# Altium PCB VFD.PcbDoc
Units mil, origin at the board's own origin, x right, y up, seen from the top; angles counter-clockwise.
Board outline 5409.55 x 5005.1 mil, 2 copper layers (Top Layer, Bottom Layer), stack 61.855 mil thick; 92 components, 43 nets, 272 pads, 80 vias.
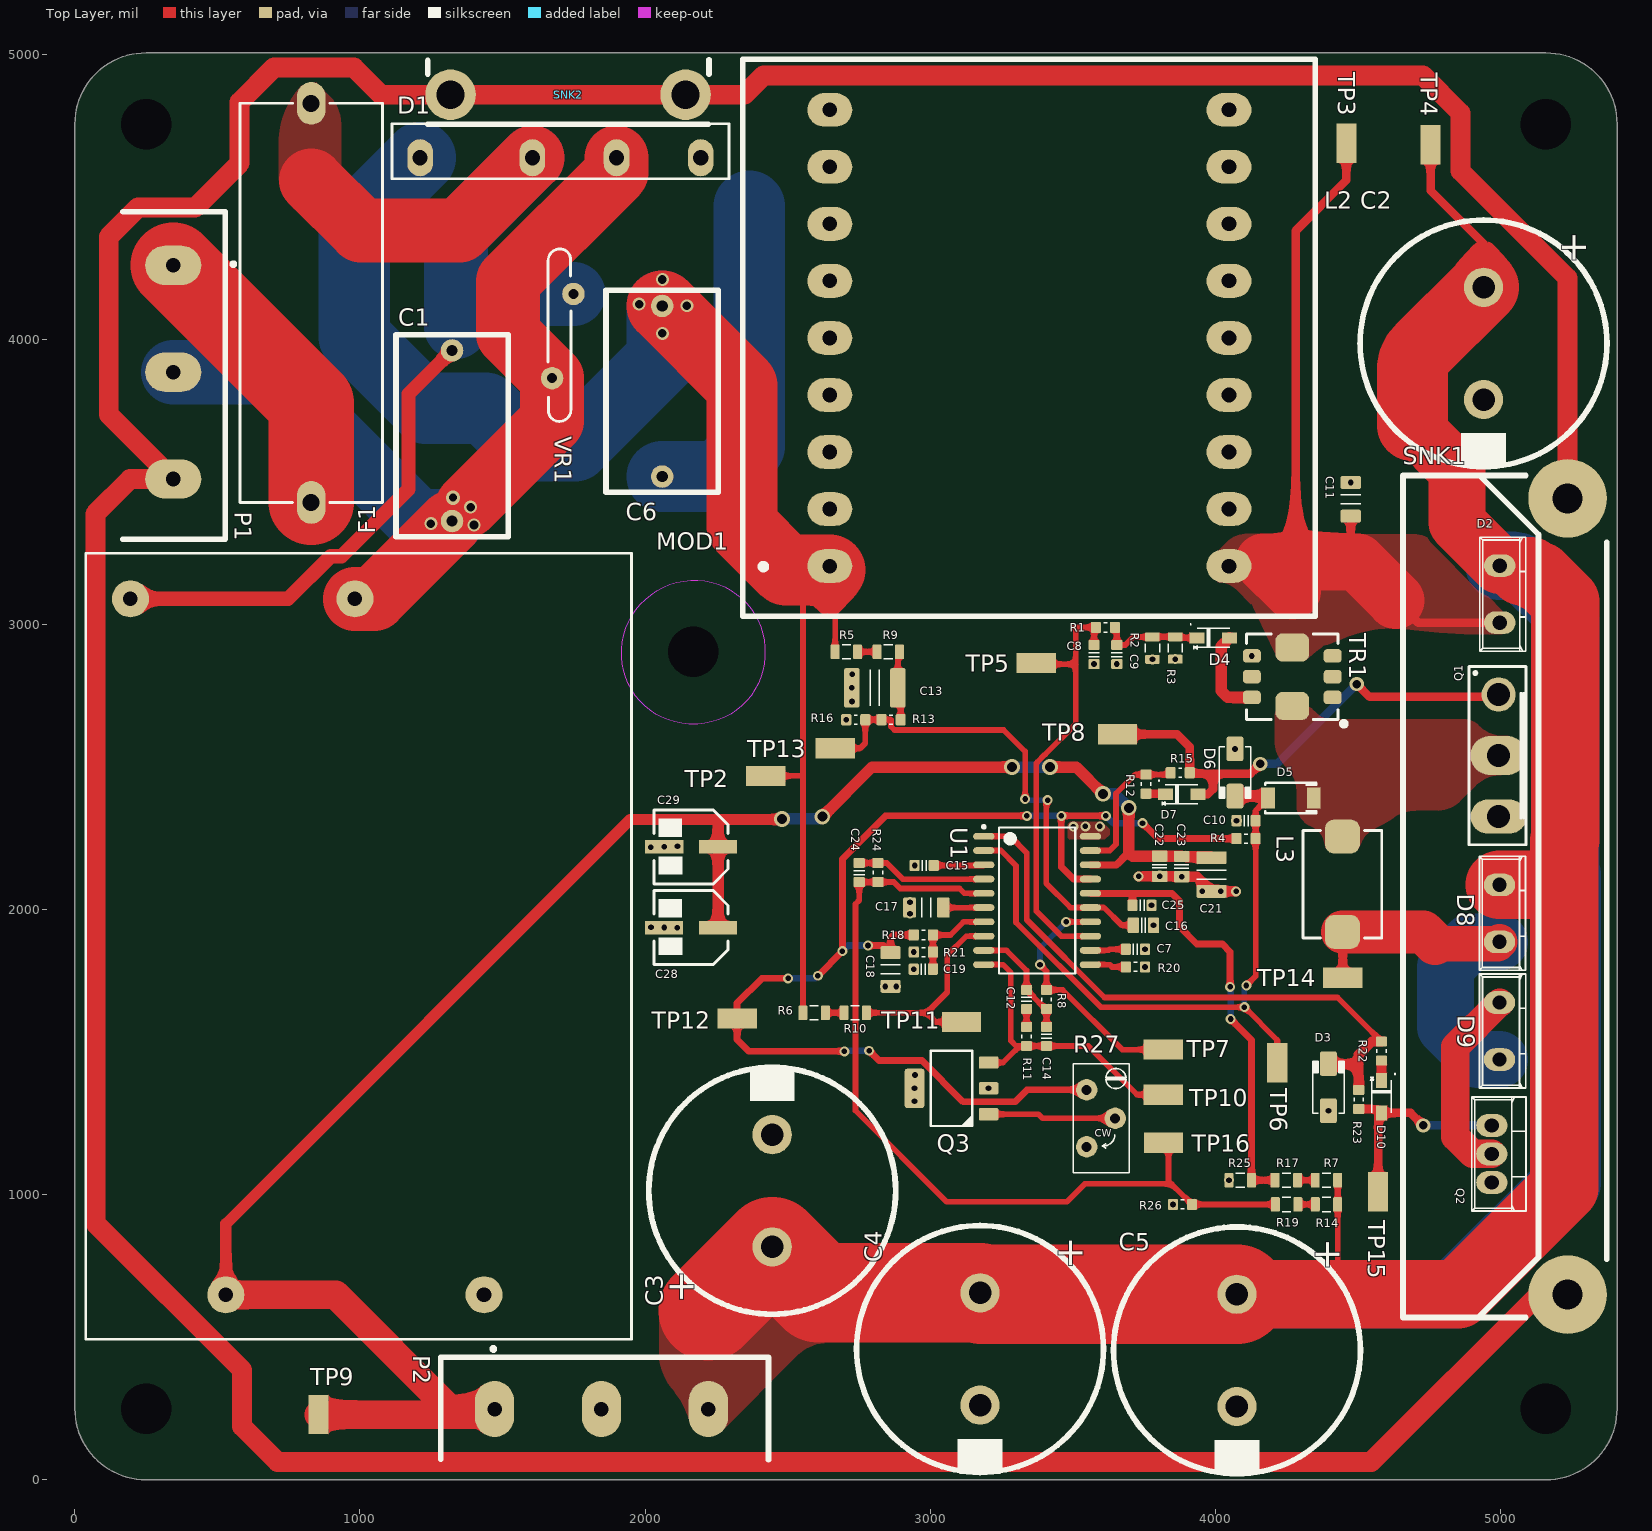
[diagram p0: Top Layer view]
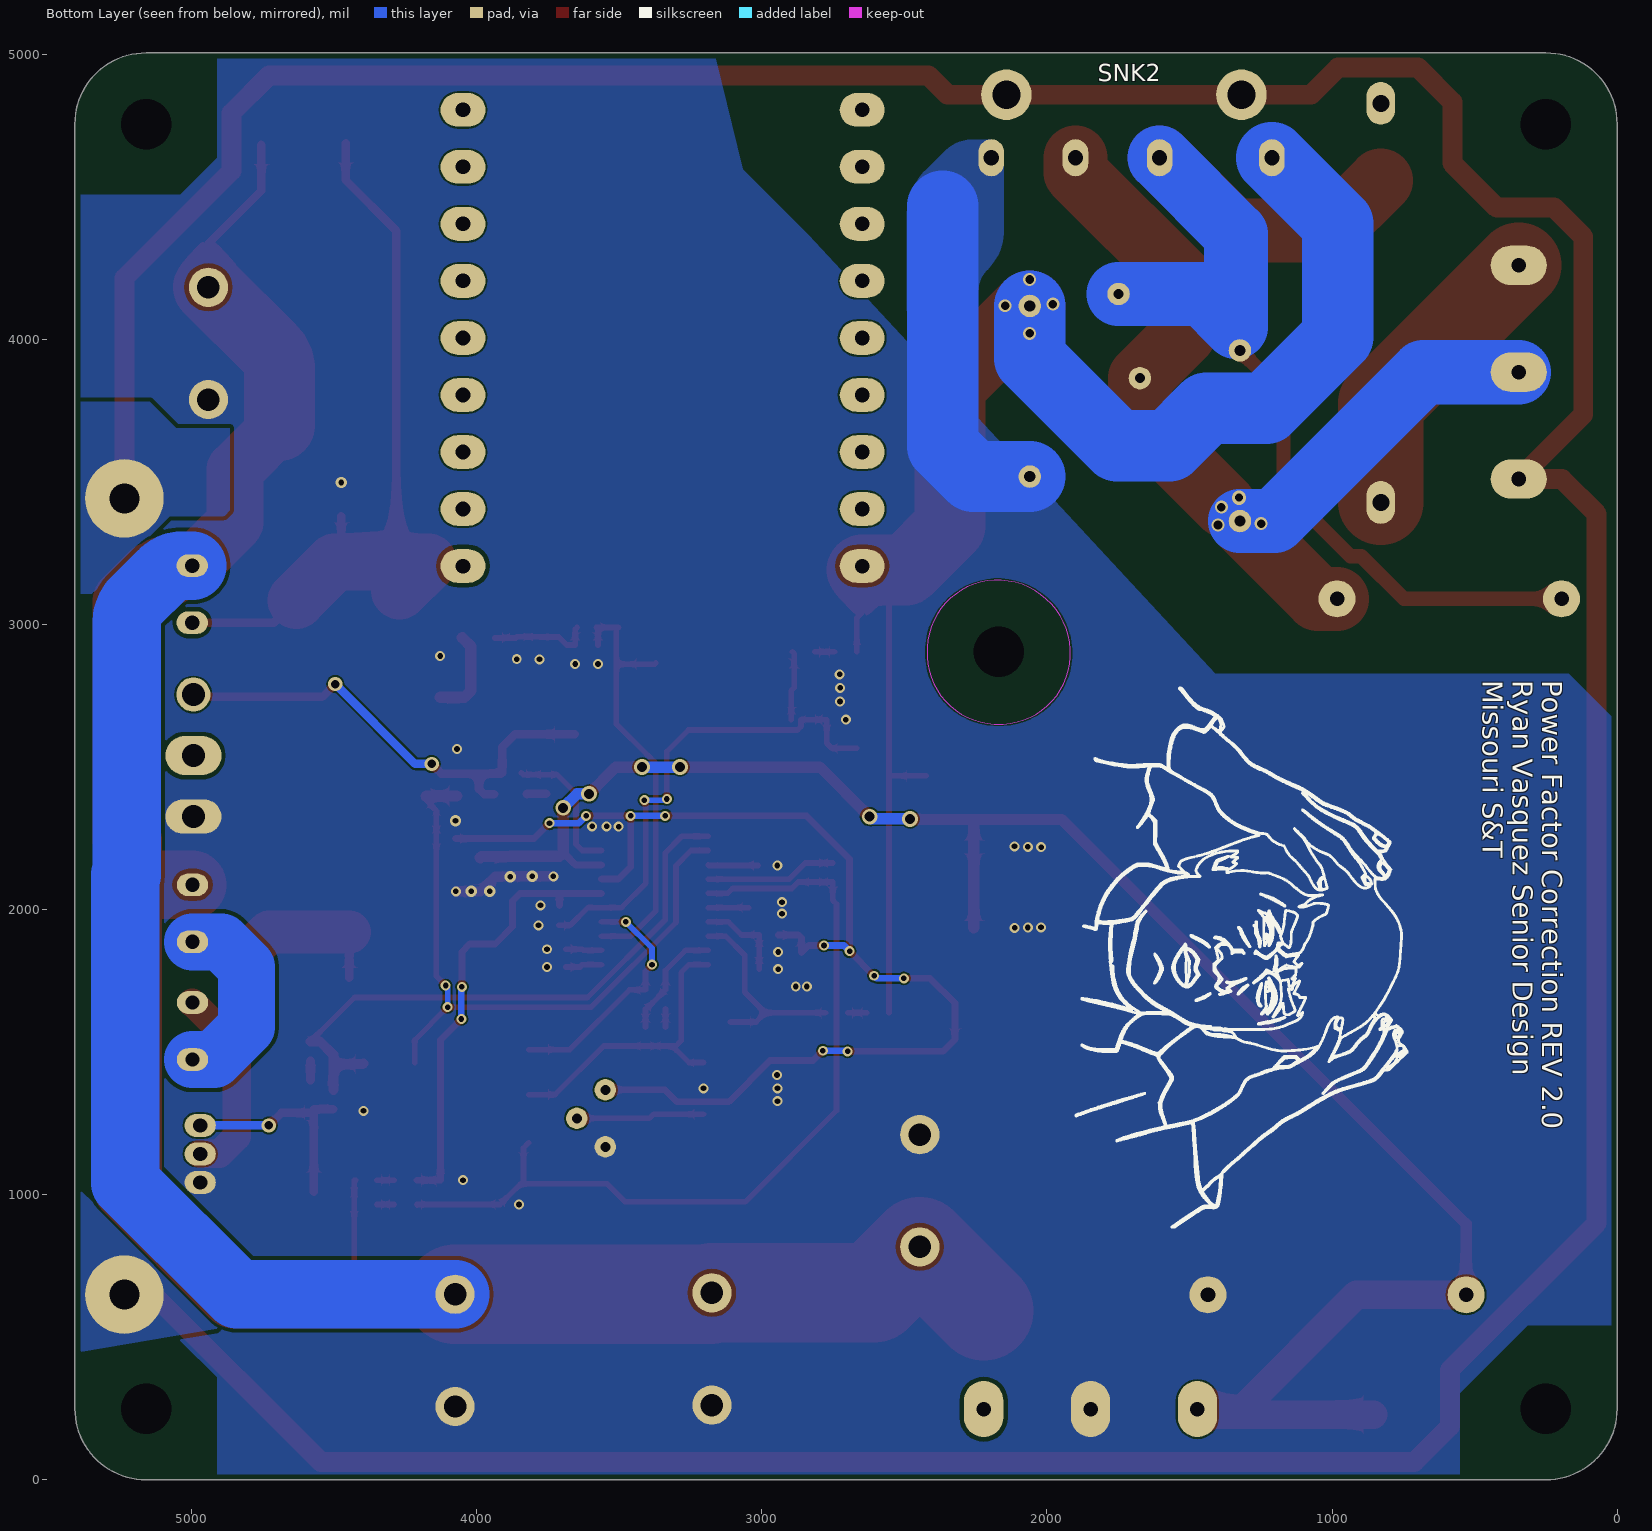
[diagram p1: Bottom Layer view, seen from below]

## Layer stack, top to bottom
Top Solder: solder mask 0.3937, Solder Resist, Dk 3.5
Top Layer: signal copper 1.4
Dielectric 1: dielectric 59.0551, FR-4, Dk 4.8
Bottom Layer: signal copper 1.4
Bottom Solder: solder mask 0.4, Solder Resist, Dk 3.5

## Board outline
0,250.05 0,4755 cw(c250.05,4755) 250.05,5005.05 5159.5,5005.05 5159.5,5005 cw(c5159.5,4754.95) 5409.55,4754.95 5409.5,4754.95 5409.5,250 cw(c5159.45,250) 5159.45,-0.05 5159.45,0 250.05,0 cw(c250.05,250.05)

## Design rules (kind name [scope] priority, off if disabled: settings)
BoardOutlineClearance [All] p1: gap=20
Clearance "HV Clearance" [InNetClass('HV')] p1: gap=15
Clearance [All] p2: gap=6
ComponentClearance [All] p1 off: gap=10 collisioncheckmode=3 verticalgap=10 showdistances=FALSE
Height [All] p1 off: minheight=0 maxheight=1000 prefheight=500
HoleSize [All] p1: absolutevalues=TRUE maxlimit=1000 minlimit=8 maxpercent=80.000 minpercent=20.000
MinimumAnnularRing [All] p1: minimumring=5
MinimumSolderMaskSliver [All] p1: minsoldermaskwidth=4
PolygonConnect [All] p1: connectstyle=Direct reliefconductorwidth=10 reliefentries=4 polygonreliefangle="90 Angle" airgapwidth=10
RoutingVias [All] p1: holewidth=10 width=20 viastyle="Through Hole" minholewidth=8 minwidth=18 maxholewidth=1000 maxwidth=1000
SilkToSilkClearance [All] p1 off: silktosilkclearance=0
SilkToSolderMaskClearance [IsPad] p1 off: minsilkscreentomaskgap=4 clearancetoexposedcopper=TRUE
SolderMaskExpansion [All] p1: expansion=4
Width [All] p1: maxlimit=1000 minlimit=4 preferedwidth=10
24 further rules are at their usual default settings.

## Classes and differential pairs
net class HV: 170V 350V AC_IN NetC11_1 NetD5_K NetD8_2 NetF1_1 NetP1_3

## Components (designator, comment, footprint, x,y, rotation, side; value= is the part's Value field where it differs from the comment)
C1 "R71MI4100AA30K" R71MI4100AA30K 1323,3662 r270 top
C2 "120u" "Capacitor 22mmx25mm" 4941,3985.85 r270 top
C3 "120u" "Capacitor 22mmx25mm" 2446,1013.85 r90 top
C4 "120u" "Capacitor 22mmx25mm" 3175,459 r270 top
C5 "120u" "Capacitor 22mmx25mm" 4076,454 r270 top
C6 "R71MI4100AA30K" R71MI4100AA30K 2060,3818 r270 top
C7 "33p" CAPC1608X90N 3720,1861 r180 top
C8 "approved sub OK" CAPC1608X90N 3574.62,2894.69 r270 top
C9 "approved sub OK" CAPC1608X90N 3654.62,2894.69 r270 top
C10 "220p" CAPC1608X90N 4108,2312 r180 top
C11 "120p" CAPC3216X180N 4475,3439 r90 top
C12 "6.2n" CAPC1608X90N 3338,1685.05 r90 top
C13 "GRM43DR72J104KW01L" CAPC4532X280N 2806.05,2778 r180 top
C14 "220p" CAPC1608X90N 3408,1555.05 r90 top
C15 "180p" CAPC1608X90N 2979,2155 r0 top
C16 "approved sub OK" CAPC2012X135N 3748,1945 r0 top
C17 "approved sub OK" CAPC3216X180N 2986.94,2007 r180 top
C18 "approved sub OK" CAPC3216X180N 2861,1790 r270 top
C19 "approved sub OK" CAPC1608X90N 2976,1791.05 r180 top
C21 "10µ" CAPC3225X220N 3987,2123 r270 top
C22 "approved sub OK" CAPC2012X135N 3805,2152 r270 top
C23 "approved sub OK" CAPC2012X135N 3882,2151 r270 top
C24 "approved sub OK" CAPC1608X90N 2751,2130 r270 top
C25 "approved sub OK" CAPC1608X90N 3743,2015 r0 top
C28 "HHXB350ARA680MF80G" CAP_POLY_HXB_F80 2161.49,1937 r270 top
C29 "HHXB350ARA680MF80G" CAP_POLY_HXB_F80 2161.51,2220 r270 top
D1 "GBJ2506-F" "4-SIP, GBJ" 1211.02,4637 r0 top
D2 "C3D06065I" TO220-2 4997.74,3206.26 r270 top
D3 "B320A-13-F" DO-214AC 4397,1377 r90 top
D4 "B320A-13-F" SOD123F 3992.96,2953 r0 top
D5 "ES1JAF" "DO-214AD  SMAF" 4265,2391 r0 top
D6 "B320A-13-F" DO-214AC 4069,2481 r270 top
D7 "B320A-13-F" SOD123F 3882.05,2405 r0 top
D8 "C3D06065I" TO220-2 4996.74,2087 r270 top
D9 "C3D06065I" TO220-2 4997,1674 r270 top
D10 "B320A-13-F" SOD123F 4583.05,1344 r270 top
F1 "Slow-blow" "3AB 3AG fuseholder" 829,4128 r90 top
L2 "120µH" "ETD 44 Horizontal" 3348,4005 r90 top
L3 "SLR1050B-121KE_" SLR1050 4446,2089 r180 top
MOD1 "VOF-15-15" "VOF-15-15 4 DIP" 1435.21,649.06 r90 top
P1 "*" "TE 796739-3 3 Screw Terminal" 345.05,3885 r270 top
P2 "*" "TE 796739-3 3 Screw Terminal" 1847,248 r0 top
Q1 "C3M0065090D" TO-247-3 4993.74,2540.26 r0 top
Q2 "IPP50R380CE" TO220V-GDS 4970,1243 r270 top
Q3 "PNP" SOT223 3075,1373 r180 top
R1 "Thick Film" RESC1608X55N 3614.62,2989.69 r0 top
R2 "Thick Film" RESC2012X70N 3779.58,2916.98 r270 top
R3 "Thick Film" RESC2012X70N 3859.58,2917.61 r270 top
R4 "Thick Film" RESC1608X55N 4108,2249 r0 top
R5 "Thick Film" RESC2012X70N 2706,2904 r0 top
R6 "Thick Film" RESC2012X70N 2593,1638 r0 top
R7 "Thick Film" RESC2012X70N 4390,1051 r180 top
R8 "Thick Film" RESC1608X55N 3408,1685.05 r270 top
R9 "Thick Film" RESC2012X70N 2853,2904 r0 top
R10 "Thick Film" RESC2012X70N 2737,1638 r0 top
R11 "Thick Film" RESC1608X55N 3338,1555.05 r90 top
R12 "Thick Film" RESC1608X55N 3757.05,2440 r270 top
R13 "Thick Film" RESC1608X55N 2863,2666 r180 top
R14 "Thick Film" RESC2012X70N 4390.05,966 r180 top
R15 "Thick Film" RESC1608X55N 3877.05,2480 r0 top
R16 "Thick Film" RESC1608X55N 2739,2666 r180 top
R17 "Thick Film" RESC2012X70N 4249.42,1051 r180 top
R18 "Thick Film" RESC1608X55N 2976,1911.05 r0 top
R19 "Thick Film" RESC2012X70N 4250.05,966 r180 top
R20 "Thin Film" RESC1608X55N 3720,1799 r0 top
R21 "Thick Film" RESC1608X55N 2976,1851.05 r180 top
R22 "Thick Film" RESC1608X55N 4583.05,1504 r270 top
R23 "Thick Film" RESC1608X55N 4503.05,1334 r270 top
R24 "Thick Film" RESC1608X55N 2817,2130 r270 top
R25 "Thick Film" RESC2012X70N 4087.63,1051 r180 top
R26 "Thick Film" RESC1608X55N 3885,966 r180 top
R27 "25 Turn" "TrimPot_THT_2.54mm pitch" 3549,1368 r0 top
SNK1 "OMNI-UNI-41-75" OMNI-UNI-41-75 5235.74,2046 r270 top
SNK2 "C247-025-1AE" "TO-247-2 With HeatSink 25mm" 1730,4677 r0 top
TP2 "*" "1206 Test Point" 2423,2469 r180 top
TP3 "*" "1206 Test Point" 4460,4688 r270 top
TP4 "*" "1206 Test Point" 4755,4683 r90 top
TP5 "*" "1206 Test Point" 3372,2865 r180 top
TP6 "*" "1206 Test Point" 4217,1463 r90 top
TP7 "*" "1206 Test Point" 3817,1509 r180 top
TP8 "*" "1206 Test Point" 3657,2615 r0 top
TP9 "*" "1206 Test Point" 855,229 r270 top
TP10 "*" "1206 Test Point" 3817,1351 r180 top
TP11 "*" "1206 Test Point" 3110,1606 r180 top
TP12 "*" "1206 Test Point" 2323,1618 r180 top
TP13 "*" "1206 Test Point" 2667,2566 r0 top
TP14 "*" "1206 Test Point" 4447,1761 r180 top
TP15 "*" "1206 Test Point" 4571,1010 r90 top
TP16 "*" "1206 Test Point" 3818,1182 r180 top
TR1 "CST1-100LB" CST1 4270,2817 r180 top
U1 "UC2855ADW" SOIC127P1030X265-20N 3375,2032 r0 top
VR1 "Varistor" "B722 14MM MOV" 1674,4159.28 r270 top

## Footprints (in the part's own frame and the unit in brackets; to place one, negate y for a bottom-side part, rotate by r counter-clockwise, add the part's x,y. Pads: shape width x height; smd on the part's side, far side on the other; paste and mask are expansions set on the pad)
"3AB 3AG fuseholder" [mil]
  oval 150x100 hole 60: 1(-700,0) 2(700,0)
  silkscreen extent -700,-250 700,250
"4-SIP, GBJ" [mil] "Bridge Rectifier Single Phase 600V 25A Through Hole GBJ"
  oval 90x130 hole 53.15: 1(0,0) 2(393.7,0) 3(688.98,0) 4(984.25,0)
  silkscreen extent -98,-74 1084,119, body extent -97,-74 1084,119, height 984
"1206 Test Point" [mm]
  rect 3.5x1.8 smd: 1(0,0)
  body extent -1.6,-0.8 1.6,0.8, height 1.26
"B722 14MM MOV" [mm] "MOV"
  round 2 hole 0.9: 1(0,1.9) 2(7.5,0)
  silkscreen extent -4.01,-0.36 11.35,1.68, body extent -4.07,-1.24 11.43,2.96, height 19
CAP_POLY_HXB_F80 [mm]
  rect 1.2x3.4 smd: 1(0,2.4) 2(0,-2.4)
  silkscreen extent -3.3,-3.3 3.3,3.3, body extent -3.3,-3.49 3.3,3.51, height 7.01
"Capacitor 22mmx25mm" [mm]
  round 3.5 hole 2: 1(-5,0) 2(5,0)
  silkscreen extent -11,-11 11,11, body extent -11,-11 11,11, height 25
CAPC1608X90N [mm] "Chip Capacitor, Body 1.6x0.8mm, EIA 0603, IPC Medium Density"
  round 0.254 on Mech15: 0(0,0)
  rrect25% 0.9x1 smd: 1(-0.85,0) 2(0.85,0)
  Top Layer pour cut-out: -0.6,0.5 -0.4,0.7 0.4,0.7 0.6,0.5 0.6,-0.5 0.4,-0.7 -0.4,-0.7 -0.6,-0.5
  silkscreen extent -0.18,-0.48 0.18,0.48, body extent -0.85,-0.45 0.85,0.45, height 0.89
CAPC2012X135N [mm] "Chip Capacitor, Body 2.0x1.2mm, EIA 0805, IPC Medium Density"
  round 0.254 on Mech15: 0(0,0)
  rrect25% 1x1.4 smd: 1(-0.9,0) 2(0.9,0)
  silkscreen extent -0.15,-0.65 0.15,0.65, body extent -1.1,-0.72 1.1,0.73, height 1.34
CAPC3216X180N [mm] "Chip Capacitor, Body 3.2x1.6mm, 1.8mm H, EIA 1206, IPC Medium Density"
  round 0.508 on Mech15: 0(0,0)
  rrect25% 1.15x1.8 smd: 1(-1.5,0) 2(1.5,0)
  silkscreen extent -0.4,-0.88 0.4,0.88, body extent -1.7,-0.9 1.7,0.9, height 1.8
CAPC3225X220N [mm] "Chip Capacitor, Body 3.2x2.5mm, EIA 1210, IPC Medium Density"
  round 0.508 on Mech15: 0(0,0)
  rrect25% 1.15x2.7 smd: 1(-1.5,0) 2(1.5,0)
  silkscreen extent -0.4,-1.3 0.4,1.3, body extent -1.8,-1.4 1.8,1.4, height 2.19
CAPC4532X280N [mm] "Chip Capacitor, Body 4.5x3.2mm, 1812, IPC Medium Density"
  round 0.508 on Mech15: 0(0,0)
  rrect25% 1.4x3.5 smd: 1(-2.05,0) 2(2.05,0)
  silkscreen extent -0.4,-1.6 0.4,1.6, body extent -2.45,-1.8 2.45,1.8, height 2.79
CST1 [mm] "Current Transformer"
  rrect50% 1.6x1.2 smd: 1(-3.6,0) 1(-3.6,1.85) 1(3.6,0) 3(-3.6,-1.85) 4(3.6,-1.85) 6(3.6,1.85)
  rrect50% 3x2.5 smd: 7(0,2.6) 8(0,-2.6)
  silkscreen extent -4.65,-3.8 4.08,4.25, body extent -4.06,-3.8 4.07,3.8, height 5.3
DO-214AC [mm] "JEDEC DO214 variation AC. SMA"
  round 0.508 on Mech15: 0(0,0)
  rrect25% 2.2x1.5 smd: A(-2.1,0) K(2.1,0)
  silkscreen extent -2.3,-1.4 2.3,1.4, body extent -2.6,-1.3 2.6,1.3, height 2.42
"DO-214AD  SMAF" [mm]
  rect 1.24x1.89 smd: A(-2.04,0) K(2.04,0)
  silkscreen extent -2.3,-1.4 2.3,1.4, body extent -2.35,-1.35 2.35,1.35, height 1.1
"ETD 44 Horizontal" [mm]
  oval 3x4 hole 1.3: 1(-20.32,17.78) 2(-20.32,-17.78) 3(-15.24,17.78) 4(-15.24,-17.78) 5(-10.16,17.78) 6(-10.16,-17.78) 7(-5.08,17.78) 8(-5.08,-17.78) 9(0,17.78) 10(0,-17.78) 11(5.08,17.78) 12(5.08,-17.78) 13(10.16,17.78) 14(10.16,-17.78) 15(15.24,17.78) 16(15.24,-17.78) 17(20.32,17.78) 18(20.32,-17.78)
  silkscreen extent -24.79,-25.48 24.82,25.53, body extent -24.79,-25.47 24.81,25.53, height 38.1
OMNI-UNI-41-75 [mm]
  round 7 hole 2.67: 0(-35.47,0) 0(35.47,0)
  silkscreen extent -37.5,-14.67 37.5,3.48, body extent -37.5,-14.67 37.5,26.33, height 63
R71MI4100AA30K [mm] "1µF Film Capacitor 220V 420V Polypropylene (PP), Metallized Radial"
  round 2 hole 1: 1(-7.6,0) 2(7.6,0)
  silkscreen extent -9,-5 9,5, body extent -9.25,-5.08 9.25,5.13, height 16.1
RESC1608X55N [mm] "Chip Resistor, Body 1.6x0.8mm, EIA 0603, IPC Medium Density"
  round 0.254 on Mech15: 0(0,0)
  rrect25% 0.9x1 smd: 1(-0.85,0) 2(0.85,0)
  Top Layer pour cut-out: -0.6,0.5 -0.4,0.7 0.4,0.7 0.6,0.5 0.6,-0.5 0.4,-0.7 -0.4,-0.7 -0.6,-0.5
  silkscreen extent -0.15,-0.41 0.15,0.41, body extent -0.87,-0.47 0.88,0.48, height 0.54
RESC2012X70N [mm] "Chip Resistor, Body 2.0x1.2mm, EIA 0805, IPC Medium Density"
  round 0.254 on Mech15: 0(0,0)
  rrect25% 0.8x1.3 smd: 1(-1,0) 2(1,0)
  Top Layer pour cut-out: -0.725,0.65 -0.525,0.85 0.525,0.85 0.725,0.65 0.725,-0.65 0.525,-0.85 -0.525,-0.85 -0.725,-0.65
  silkscreen extent -0.38,-0.64 0.38,0.64, body extent -1.1,-0.67 1.1,0.68, height 0.69
SLR1050 [mm] "SLR1050 Series High Current  Shielded Power Inductors"
  rrect50% 3.1x3 smd: 1(0,-4.25) 2(0,4.25)
  silkscreen extent -3.5,-4.8 3.5,4.8, body extent -3.5,-4.8 3.5,4.8, height 4.85
SOD123F [mm]
  rect 1.34x1 smd: A(1.45,0) K(-1.45,0)
  silkscreen extent -2.07,-1 1.45,1.25, body extent -1.8,-0.97 1.8,0.97, height 1.08
SOIC127P1030X265-20N [mm] "SOIC, 20-Leads, Body 12.80x7.50mm, Pitch 1.27mm, IPC Medium Density"
  oval 1.9x0.6 smd: 1(-4.75,5.715) 2(-4.75,4.445) 3(-4.75,3.175) 4(-4.75,1.905) 5(-4.75,0.635) 6(-4.75,-0.635) 7(-4.75,-1.905) 8(-4.75,-3.175) 9(-4.75,-4.445) 10(-4.75,-5.715) 11(4.75,-5.715) 12(4.75,-4.445) 13(4.75,-3.175) 14(4.75,-1.905) 15(4.75,-0.635) 16(4.75,0.635) 17(4.75,1.905) 18(4.75,3.175) 19(4.75,4.445) 20(4.75,5.715)
  silkscreen extent -4.87,-6.5 3.4,6.69, body extent -5.15,-6.5 5.15,6.5, height 2.65
SOT223 [mm] "SOT223 /SC-73"
  round 1 on Mech15: 0(0,0)
  rrect25% 1.75x1.1 smd: 1(-3.3,2.3) 2(-3.3,0) 3(-3.3,-2.3)
  rrect25% 1.75x3.5 smd: 4(3.3,0)
  silkscreen extent -1.85,-3.35 1.85,3.35, body extent -3.65,-3.35 3.65,3.35, height 1.8
"TE 796739-3 3 Screw Terminal" [mm]
  oval 3.5x5 hole 1.3: 1(-9.52,0) 2(0,0) 3(9.52,0)
  silkscreen extent -14.3,-4.5 14.88,5.45, body extent -14.28,-7.88 14.88,4.62, height 21.65
TO220-2 [mil]
  oval 80x110 hole 50: 1(0,0) 2(200,0)
  silkscreen extent -100,-70 300,92, body extent -95,-90 285,88, height 738
TO220V-GDS [mil]
  oval 80x110 hole 50: 1(0,0) 2(100,0) 3(200,0)
  silkscreen extent -100,-70 300,120, body extent -110,-71 310,120, height 940
"TO-247-2 With HeatSink 25mm" [mm]
  round 4.5 hole 2.5: 0(-10.47,4.6) 0(10.47,4.6)
  silkscreen extent -12.5,1.98 12.55,7.72, body extent -12.5,-5.85 12.5,12.15, height 38
TO-247-3 [mil]
  round 120 hole 80: 1(0,214)
  oval 196.85x137.8 hole 80: 2(0,0)
  oval 196.85x120 hole 80: 3(0,-214)
  silkscreen extent -104,-313 96,313, body extent -104,-313 96,313, height 998
"TrimPot_THT_2.54mm pitch" [mil] "TRIMMER, MURATA, PV36Y"
  round 75 hole 35: 1(0,0) 2(100,-100) 3(0,-200)
  silkscreen extent -47,-291 150,91, body extent -47,-287 150,91, height 445
"VOF-15-15 4 DIP" [mm] "Open Frame AC DC Converter 1 Output 15V 1A 85 ~ 264 VAC Input"
  round 3.302 hole 1.3: GND(0,0) L(62,31.5) N(62,11.5) Vo(0,23)
  silkscreen extent -3.96,-13.13 66.07,35.48, body extent -3.95,-13.12 66.05,35.48, height 22.95

## Part data
C1 C6: library part CAPMF_1u_420V_MK, "1µF Film Capacitor 220V 420V Polypropylene (PP), Metallized Radial"
C2 C3 C4 C5: library part CAPE_120u_450V_THD, "Aluminum Electrolytic Capacitors Radial, Can - Snap-In 2000 Hrs @ 85°C"
C7: library part CAPC_33p_0603_NP0_50V_5%, "Capacitor SMD Cer 33pF 5% 50V NP0 0603"
C8 C9 C19: library part CAPC_1n_0603_X7R_100V_10%, "Capacitor SMD Cer 1nF 10% 100V X7R 0603"
C10: library part CAPC_220p_0603_NP0_50V_5%, "Capacitor SMD Cer 220pF 5% 50V NP0 0603"
C11: library part CAPC_120p_1206_U2J_1KV_5%, "Capacitor SMD Cer 120pF 5% U2J 1KV 1206"
C12: library part CAPC_6.2nF_0603_NP0_50V, "Capacitor SMD Cer 8pF ±0.5pF 50V NP0 0603"
C13: library part CAPC_100n_1812_X7R_630V_10%, "0.1µF ±10% 630V Ceramic Capacitor X7R 1812 (4532 Metric)"
C14: library part CAPC_220p_0603_NP0_50V_1%, "Capacitor SMD Cer 220pF 1% 50V NP0 0603"
C15: library part CAPC_180p_0603_NP0_50V_1%, "Capacitor SMD Cer 180pF 1% 50V NP0 0603"
C16: library part CAPC_470n_0805_X7R_50V_10%, "0.47µF ±10% 50V Ceramic Capacitor X7R 0805 (2012 Metric)"
C17 C18: library part CAPC_1u_1206_X7R_35V_10%, "Capacitor SMD Cer 1uF 10% 35V X7R 1206"
C21: library part CAPC_10u_1210_50V, "Capacitor SMD Cer 10uF 20% 16V X5R 1210"
C22 C23: library part CAPC_100n_0805_X7R_50V_10%, "Capacitor SMD Cer 100nF 10% 50V X7R 0805"
C24: library part CAPC_82n_0603_X7R_50V_10%, "Capacitor SMD Cer 82nF 10% 50V X7R 0603"
C25: library part CAPC_100n_0603_X7R_50V_10%, "Capacitor SMD Cer 100nF 10% 50V X7R 0603"
C28 C29: library part CAPP_68u_35V_SMD, "Capacitor SMD Alum Polymer 68uF 20% 35V"
D1: library part BRIDGE_RECT_600V_25A_GBJ2506-F, "Bridge Rectifier Single Phase 600V 25A Through Hole GBJ"
D2 D8 D9: library part DIODE_SIC_SCHOTTKY_650V_13A_C3D06065I, "Diode Silicon Carbide Schottky 13A (DC) Through Hole TO-220-2 Isolated Tab"
D3 D6: library part DIODE_SCHOTTKY_20V_3A_B320A-13-F, "Diode Schottky 20V 3A Surface Mount SMA"
D4 D7 D10: library part DIODE_SCHOTTKY_20V_1A_MBR1020VL, "Diode Schottky 20V 1A Surface Mount SOD-123F"
D5: library part DIODE_600V_1A_SMA_ES1JAF, "Diode Standard 1A Surface Mount DO-214AD (SMAF)"
F1: library part "FUSE_HOLDER_   03540101ZXGY", "Fuse Block 600V Circuit Cartridge PCB"
L2: library part INDC_120u_ETD44_8A, "Custom Wound ETD44"
L3: library part INDC_120n_48.8A, "Power Inductor 120nH 48.8A"
MOD1: library part AC_DC_265V_15V_VOF-15-15, "Open Frame AC DC Converter 1 Output 15V 1A 85 ~ 264 VAC Input"
P1 P2: library part "3P_TERM BLOCK 796739-3", "3 Position Wire to Board Terminal Block Horizontal with Board 0.375\" (9.53mm) Through Hole"
Q1: library part SiC_N-CHAN_900V_36A_C3M0065090D, "N-Channel 36A (Tc) 125W (Tc) Through Hole TO-247-3"
Q2: library part MOSFET_N-CHAN_IPP50R380CE, "N-Channel 9.9A (Tc) 73W (Tc) Through Hole PG-TO-220-3"
Q3: library part PNP_PZT3906, "Bipolar (BJT) Transistor PNP 40V 200mA 250MHz 1W Surface Mount SOT-223-4"
R1: library part RES_100K_0603_1%, "Resistor SMD chip 100k Ohm 0.1W 1% 0603"
R2 R3: library part RES_26R1_0805_1%, "Resistor SMD chip 26.1k Ohm 0.125W 1% 0805"
R4: library part RES_1K_0603_1%, "Resistor SMD chip 1k Ohm 0.1W 1% 0603"
R5 R6 R9 R10: library part RES_390K_0805_1%, "Resistor SMD chip 390k Ohm 0.125W 1% 0805"
R7 R17: library part RES_1M_0805_1%, "Resistor SMD chip 1M Ohm 0.125W 1% 0805"
R8: library part RES_3K3_0603_1%, "Resistor SMD chip 3.3k Ohm 0.1W 1% 0603"
R11: library part RES_2K61_0603_1%, "Resistor SMD chip 2.61k Ohm 0.1W 1% 0603"
R12 R22: library part RES_2R7_0603_5%, "Resistor SMD chip 2.7 Ohm 0.1W 5% 0603"
R13: library part RES_120K_0603_1%, "Resistor SMD chip 120K Ohm 0.1W 1% 0603"
R14 R19: library part RES_681K_0805_1%, "Resistor SMD chip 681K Ohm 0.125W 1% 0805"
R15 R23: library part RES_5R1_0603_1%, "Resistor SMD chip 5.1 Ohm 0.1W 1% 0603"
R16: library part RES_18K_0603_1%, "Resistor SMD chip 18K Ohm 0.1W 1% 0603"
R18: library part RES_1.2M_0603_1%, "Resistor SMD chip 1.2M Ohm 0.1W 1% 0603"
R20: library part RES_220K_0603_1%, "Resistor SMD chip 220k Ohm 0.1W 1% 0603"
R21: library part RES_3K16_0603_1%, "Resistor SMD chip 3.16k Ohm 0.1W 1% 0603"
R24: library part RES_180K_0603_1%, "Resistor SMD chip 180K Ohm 0.1W 1% 0603"
R25: library part RES_44K2_0805_1%, "Resistor SMD chip 44.2k Ohm 0.125W 1% 0805"
R26: library part RES_11K3_0603_1%, "Resistor SMD chip 11.3K Ohm 0.1W 1% 0603"
R27: library part RES_TRIMMER_1K_25T_THT, "Trimmer, 25-Turn, 1K cermet"
SNK1: library part HEATSINK_OMNI-UNI-41-75, "Heat Sink TO-247, TO-264 Aluminum Board Level, Vertical"
SNK2: library part HEATSINK_C247-025-1AE, "Heat Sink TO-247 Aluminum 5W @ 60°C Board Level, Vertical"
TP2 TP3 TP4 TP5 TP6 TP7 TP8 TP9 TP10 TP11 TP12 TP13 TP14 TP15 TP16: library part "TESTPOINT SMD 1206"
TR1: library part CURRENT_100:1_20A_CST1-100LB, "Sufrace Mount Current Transformer 100:1 Ratio 20A"
U1: library part PFC_UC2855BDW, "PFC IC Average Current 500kHz 20-SOIC"
VR1: library part Varistor_390V_4.5KA_B72214S0251K101, "390V Varistor Circuit Through Hole Disc 14mm"

## Free pads (board coordinates)
  round 60 hole 177.17 mask+196.85: 1(250.05,250) 1(250.05,4755) 1(5159.5,250) 1(5159.5,4755)
  round 60 hole 177.17 unplated mask+196.85: 1(2169,2904)

## Via types
v1: diameter 35, hole 20, Top Layer to Bottom Layer, tented both sides, 53 vias
v2: diameter 45, hole 30, Top Layer to Bottom Layer, 7 vias
v3: diameter 55, hole 35, Top Layer to Bottom Layer, tented both sides, 6 vias
v4: diameter 40, hole 20, Top Layer to Bottom Layer, tented both sides, 6 vias
v5: diameter 35, hole 20, Top Layer to Bottom Layer, 4 vias
v6: diameter 50, hole 30, Top Layer to Bottom Layer, tented both sides, 3 vias
v7: diameter 50, hole 28, Top Layer to Bottom Layer, tented both sides, 1 vias

## Nets (pads, with @x,y where several pads share a name; then routed paths per layer and width w, separated by ;. In a path a pad name is that pad's centre, name@x,y a point inside that pad or via, vN(x,y) a via of type N, cw(c..) or ccw(c..) an arc to the next point about the centre after c; other vN are vias at no path point)
15V: C21.1 C22.1 C23.1 C28.1 C29.1 MOD1.Vo P2.1 TP9.1 U1.18 | length 6809.2
  Top Layer w25: U1.18 3654,2157 3697,2200 3697,2212
  Top Layer w40: MOD1.Vo 529.7,897.7 1948,2316 2253,2316 ; C28.1@2256,1937.02 C29.1 2256,2313 2253,2316 ; v3(2480,2318) 2478,2316 2253,2316 ; v3(2622,2326) 2796,2500 v3(3287,2500) ; v3(3420,2500) 3512,2500 v3(3606,2406) ; 3697,2200 3710,2187 3804.57,2187 C22.1 3881,2187.43 C23.1 3982.62,2186.43 C21.1 ; 3697,2212 v3(3697,2357)
  Top Layer w100: MOD1.Vo 914.94,649.06 1316,248 P2.1@1421,248 ; TP9.1 1402,229 P2.1@1421,248 ; P2.1 P2.1@1421,248
  Bottom Layer w40: v3(2480,2318) 2614,2318 v3(2622,2326) ; v3(3287,2500) v3(3420,2500) ; v3(3606,2406) 3648,2406 v3(3697,2357)
170V: C6.1 D1.1 L2.1 R5.1 R6.1 TP2.1 | length 5565.2
  Top Layer w20: TP2.1 2549.63,2469 2553.63,2473 ; R6.1 2553.63,2473 ; L2.1 L2.1@2648,3191 ; R5.1 2666.63,3023.37 2648,3042 L2.1@2648,3191 ; 2553.63,2473 2553.63,3096.63 L2.1@2648,3191
  Top Layer w250: C6.1 2340,3837.21 2340,3345 2494,3191 L2.1@2648,3191
  Bottom Layer w250: D1.1 980,4405.98 980,4008.85 1230.56,3758.29 1440.35,3758.29 1571.32,3627.31 1753.31,3627.31 2060,3934 C6.1
  other v2: 2061,4021 2147,4118 1979,4124 2061,4210
350V: C2.1 C3.1 C4.1 C5.1 D2.1 D8.1 P2.3 R7.1 R14.1 TP4.1 | length 11607.7
  Top Layer w20: 4428,650.85 4429.42,652.27 R14.1 4429.42,1046 4424.42,1051 R7.1
  Top Layer w30: TP4.1 4755,4522 4941,4336 C2.1
  Top Layer w200: 4692,3698 4847,3543 4847,3357 D2.1
  Top Layer w240: C5.1 4428,650.85 4851.26,650.85 5224.17,1023.76 5224.17,2098 ; D8.1 5213.17,2087 5224.17,2098 ; 5075.94,3187.19 5105.22,3187.19 5122.74,3169.66 5137.34,3169.66 5227.17,3079.83 5227.17,2245.49 5224.17,2242.49 5224.17,2098
  Top Layer w250: 4692,3698 4692,3892.28 cw(c4792,3892.28) 4721.29,3962.99 C2.1
  Top Layer w350: 2221.8,592.8 C3.1 2607.15,655.85 C4.1 3180,650.85 C5.1
  Bottom Layer w240: C5.1 4840.34,650.85 5232,1042.51 5232,2122 5227.17,2122 5227.17,3010.41 ccw(c5127.17,3010.41) 5197.88,3081.12 5102.03,3176.97 ccw(c5031.32,3106.26) 5031.32,3206.26 D2.1
AC_IN: C1.1 D1.2 F1.2 MOD1.L VR1.1 | length 3801.9
  Top Layer w50: MOD1.L 748,3090 897.5,3239.5 935.5,3239.5 1170,3474 1170,3808.21 C1.1
  Top Layer w225: 829,4557 1004,4382 1349.72,4382 D1.2
  Bottom Layer w225: D1.2 1337,4369.28 1337,4044 1452.28,4159.28 VR1.1
GND: C2.2 C3.2 C4.2 C5.2 C6.2 C7.1 C8.2 C9.2 C10.2 C11.2 C13.2 C15.1 C16.2 C17.2 C18.2 C19.2 C21.2 C22.2 C23.2 C25.2 C28.2 C29.2 D1.4 D3.A D6.A MOD1.GND P2.2 Q1.3 Q2.3 Q3.2 Q3.4 R2.2 R3.2 R16.2 R20.2 R21.2 R25.2 R26.2 R27.3 TR1.4 U1.20 | length 1554.7
  Top Layer w35: v1(3731.43,2116.57) v4(3805,2116.57) 3881,2116.57 v4(3882,2115.57) 3935.43,2115.57 3987,2064 C21.2 v1(4073.06,2063.94)
  Bottom Layer w250: C6.2 2258.79,3518.79 2365,3625 2365,4467.28
  other v1: 3851.54,966 4048.26,1051 4397,1294.32 2945,1328 2945.08,1373 3204.92,1373 2947,1420 2842,1730 2881,1730 2942.54,1791.05 3753.46,1799 2942.54,1851.05 3753.46,1861 2113,1936 2067,1937 2021,1938 3783.43,1945 2929,1986 3776.46,2015 2929,2026 2020,2219 2067.02,2220 2114,2222 4069,2563.68 2705.54,2666 2726,2730 2725.34,2778 2727,2825 3574.62,2861.22 3654.62,2861.22 3779.58,2877.61 3859.58,2878.24 4128.27,2889.83
  other v4: 3954,2064 4019,2064 4074.54,2312 4475,3498.06
  other v5: 2945.54,2155 3502,2291 3544,2292 3595,2292
NetC1_2: C1.2 D1.3 MOD1.N P1.2 VR1.2 | length 3206
  Top Layer w225: MOD1.N 1050.21,3090 C1.2@1318.11,3357.89 ; v2@1377.11,3416.89 1674,3713.79 VR1.2 1519,4019 1519,4204 1900,4585 D1.3
  Bottom Layer w225: P1.2 680,3885 1202.21,3362.79 C1.2
  other v2: 1400,3349 1249,3354 1388,3412
  other v7: 1326,3445
NetC7_2: C7.2 U1.12 | length 126.2
  Top Layer w20: U1.12 3626,1857 3630,1861 C7.2
NetC8_1: C8.1 R1.1 TP5.1 U1.13 | length 1565.4
  Top Layer w20: TP5.1 3376,2861 3511,2861 ; U1.13 3460,1907 3372.5,1994.5 3372.5,2513.5 3376.5,2517.5 3376.5,2518.02 3401.98,2543.5 3402.5,2543.5 3511,2652 3511,2861 ; C8.1 3574.62,2983.15 R1.1 3502.69,2989.69 3511,2981.37 3511,2861
NetC9_1: C9.1 D4.K R1.2 R2.1 R3.1 | length 358.8
  Top Layer w20: R1.2 3654.62,2983.15 C9.1 3684.15,2928.15 3712.35,2956.35 R2.1 ; R2.1@3779.58,2956.98 R3.1 3863.55,2953 D4.K
NetC10_1: C10.1 D5.A D6.K R4.2 TP6.1 U1.2 | length 2386.6
  Top Layer w20: U1.2 3248,2207 3301,2154 3301,1955 3598,1658 v1(4102,1658) 4217,1543 TP6.1 ; v1(4109,1734) 4141.46,1766.46 R4.2 C10.1 4141.46,2347.78 D5.A D5.A@4177.36,2398.32
  Top Layer w40: D6.K D5.A@4177.36,2398.32
  Bottom Layer w20: v1(4102,1658) 4102,1727 v1(4109,1734)
NetC11_1: C11.1 D2.2 L2.2 TP3.1 TR1.8 | length 2773.3
  Top Layer w30: 4282,3219 4282,4381 4460,4559 TP3.1 ; C11.1 4475,3243 4499,3219 ; 4633,3085 4711.74,3006.26 D2.2
  Top Layer w200: 4270,3118 4169,3219 4282,3219 4499,3219 4633,3085
NetC12_1: C12.1 R11.2 | length 63.1
  Top Layer w20: R11.2 C12.1
NetC12_2: C12.2 C14.2 R8.2 U1.9 | length 409.6
  Top Layer w20: U1.9 3268,1857 3338,1787 C12.2 R8.2@3404.93,1651.59 ; C14.2 3408,1648.51 R8.2@3404.93,1651.59 ; R8.2 R8.2@3404.93,1651.59
NetC13_1: C13.1 R9.2 R13.1 | length 244.3
  Top Layer w20: R9.2 2886.76,2898.39 C13.1 2896.46,2768.29 R13.1
NetC14_1: C14.1 Q3.3 R11.1 TP10.1 U1.10 | length 1090.6
  Top Layer w20: U1.10 3255,1807 3283,1779 3283,1540 3301.41,1521.59 3313.59,1521.59 ; Q3.3 3255.55,1463.55 3313.59,1521.59 ; TP10.1 3725,1351 3554.41,1521.59 C14.1 R11.1 3313.59,1521.59
NetC15_2: C15.2 U1.3 | length 176.4
  Top Layer w20: C15.2 3185.99,2155 U1.3
NetC16_1: C16.1 R13.2 R16.1 TP13.1 U1.15 | length 1731.8
  Top Layer w20: TP13.1 2755,2566 2772.46,2583.46 R16.1 R13.2 2862.75,2666 2862.75,2642.28 2874.72,2630.31 3257.69,2630.31 3333,2555 v1(3333,2388) ; v1(3412,2384) 3407,2379 3407,2092 3492,2007 U1.15 3610,2007 3672,1945 C16.1
  Bottom Layer w20: v1(3333,2388) 3329,2384 v1(3412,2384)
NetC17_1: C17.1 U1.6 | length 142
  Top Layer w20: C17.1 U1.6
NetC19_1: C19.1 R18.2 R21.1 U1.7 | length 317.6
  Top Layer w20: C19.1 R21.1 R18.2 3071.05,1911.05 3117,1957 U1.7
NetC24_1: C24.1 R24.1 U1.4 | length 460.4
  Top Layer w20: C24.1 R24.1 2847.54,2163.46 2904,2107 U1.4
NetC24_2: C24.2 R19.2 R24.2 R26.1 TP16.1 U1.5 | length 3080.1
  Top Layer w20: U1.5 3120,2057 3103,2074 2895,2074 2872.46,2096.54 R24.2 C24.2 2751,2033 2738,2020 2738,1295 3058,975 3479,975 3542,1038 3846.46,1038 ; TP16.1 3836,1164 3836,1048.46 3846.46,1038 ; R19.2@4208.68,964 R19.2 R26.1 3846.46,1038
NetC25_1: C25.1 R17.2 R25.1 U1.16 | length 1584.3
  Top Layer w24: U1.16 3563.01,2056 3711,2056 ; C25.1 3709.54,2054.54 3711,2056 ; v1(4052,1729) 4052,1852 4025,1879 3935,1879 3874,1940 3874,2030 3848,2056 3711,2056 ; v1(4054,1616) 4127,1543 R25.1 R17.2
  Bottom Layer w24: v1(4052,1729) 4054,1727 v1(4054,1616)
NetD3_K: D3.K R22.1 R23.1 U1.1 | length 2160.2
  Top Layer w20: U1.1 3281,2257 3339,2199 3339,1964.15 3611.65,1691.5 4429.01,1691.5 R22.1
  Top Layer w35: D3.K 4398.68,1458 4503.05,1458 ; R23.1 4503.05,1458 ; R22.1 4549.46,1537.46 4503.05,1491.05 4503.05,1458
NetD4_A: D4.A TR1.6 | length 314.8
  Top Layer w40: D4.A 4021,2923.95 4021,2767 4043.83,2744.17 TR1.6
NetD5_K: D5.K L3.1 Q1.2 TR1.7
NetD7_A: D7.A Q1.1 R15.2 TP8.1 | length 1709.9
  Top Layer w30: TP8.1 3866,2615 3910.51,2570.49 R15.2 3913.51,2477 3992,2477 ; D7.A 3974,2405 3992,2423 3992,2477 ; v6(4158,2511) 4124,2477 3992,2477 ; v6(4496,2791) 4541,2746 Q1.1@4993.74,2746
  Bottom Layer w30: v6(4158,2511) 4216,2511 v6(4496,2791)
NetD7_K: D7.K R12.2 | length 68.5
  Top Layer w30: R12.2 3823.43,2406.54 D7.K
NetD8_2: D8.2 D9.2 L3.2 TP14.1 | length 1404.4
  Top Layer w30: L3.2 4447,1920.68 TP14.1
  Top Layer w125: 4771,1880 4989.74,1880 D8.2
  Top Layer w150: L3.2 4729.32,1921.68 4771,1880
  Bottom Layer w200: D8.2 4896,1887 4808,1799 4808,1588 4922,1474 D9.2
NetD9_1: D9.1 Q2.2 | length 687.5
  Top Layer w100: Q2.2 4903,1143 4842,1204 4842,1519 D9.1
NetD10_A: D10.A Q2.1 R23.2 TP15.1 | length 779.7
  Top Layer w30: R23.2 4569.43,1300.54 D10.A@4571,1298.96 ; TP15.1 D10.A@4571,1298.96 ; v6(4729,1243) 4685.09,1286.91 D10.A D10.A@4571,1298.96
  Bottom Layer w30: v6(4729,1243) Q2.1
NetD10_K: D10.K R22.2 | length 69.4
  Top Layer w30: D10.K R22.2
NetF1_1: F1.1 P1.1 | length 1032.3
  Top Layer w300: P1.1 829,3775.85 F1.1
NetP1_3: P1.3 SNK1.0 SNK2.0 | length 16366.3
  Top Layer w70: SNK1.0@5235.74,649.54 5133.54,649.54 4547,63 711,63 587,187 587,385 72,900 72,3388 194.2,3510.2 P1.3 119,3736.25 119,4360 221,4462 422,4462 578,4618 578,4833 698,4953 979,4953 1073.9,4858.1 1317.8,4858.1 2142.2,4858.1 2348.1,4858.1 2416,4926 4728,4926 4860,4794 4860,4591 5235.74,4215.26 SNK1.0@5235.74,3442.46
NetQ3_1: Q3.1 R27.2 | length 450.1
  Top Layer w20: Q3.1 3379.55,1282.45 3394,1268 R27.2
NetR5_2: R5.2 R9.1 | length 68.3
  Top Layer w20: R5.2 R9.1
NetR6_2: R6.2 R10.1 | length 65.3
  Top Layer w20: R6.2 R10.1
NetR7_2: R7.2 R17.1 | length 61.8
  Top Layer w20: R17.1 R7.2
NetR8_1: R8.1 TP7.1 U1.14 | length 866.9
  Top Layer w20: v1(3385,1807) 3408,1784 R8.1 3464.49,1718.51 3674,1509 TP7.1 ; v1(3477,1957) U1.14
  Bottom Layer w20: v1(3385,1807) 3385,1865 v1(3477,1957)
NetR10_2: R10.2 TP11.1 U1.8 | length 734.5
  Top Layer w20: R10.2 2988,1638 ; TP11.1 3020,1606 2988,1638 ; U1.8 3127,1907 3060,1840 3060,1710 2988,1638
NetR12_1: R12.1 R15.1 U1.19 | length 498.9
  Top Layer w20: U1.19 3630,2207 3652,2229 3652,2407 3718.46,2473.46 R12.1 3837.05,2473.46 R15.1
NetR14_2: R14.2 R19.1 | length 61.3
  Top Layer w20: R19.1 R14.2
NetR20_1: R20.1 U1.11 | length 127.8
  Top Layer w20: U1.11 3630,1807 3638,1799 R20.1
PFC_V: C18.1 R4.1 R18.1 R27.1 TP12.1 U1.17 | length 4339.2
  Top Layer w24: v1(2502,1759) 2410,1759 2323,1672 TP12.1 2323,1544 2364,1503 v1(2699,1503) ; v1@2606,1773 v1(2606,1768) v1(2692,1854) 2692,2178 2843,2329 v1(3339,2329) ; v1(2782,1874) 2836.06,1874 C18.1 2861,1901 2871.05,1911.05 R18.1 ; v1(2786,1505) 2820,1471 2970.84,1471 3115.84,1326 3297,1326 3339,1368 R27.1 ; U1.17 3502.74,2107 3460,2149.74 v1(3460,2329) v1(3616,2329) ; v1(3745,2303) 3799,2249 R4.1
  Bottom Layer w24: v1(2502,1759) 2597,1759 v1(2606,1768) ; v1(2692,1854) 2712,1874 v1(2782,1874) ; v1(2699,1503) 2701,1505 v1(2786,1505) ; v1(3339,2329) v1(3460,2329) ; v1(3616,2329) 3642,2303 v1(3745,2303)
pads on no net: C7.0 C8.0 C9.0 C10.0 C11.0 C12.0 C13.0 C14.0 C15.0 C16.0 C17.0 C18.0 C19.0 C21.0 C22.0 C23.0 C24.0 C25.0 D3.0 D6.0 L2.3 L2.4 L2.5 L2.6 L2.7 L2.8 L2.9 L2.10 L2.11 L2.12 L2.13 L2.14 L2.15 L2.16 L2.17 L2.18 Q3.0 R1.0 R2.0 R3.0 R4.0 R5.0 R6.0 R7.0 R8.0 R9.0 R10.0 R11.0 R12.0 R13.0 R14.0 R15.0 R16.0 R17.0 R18.0 R19.0 R20.0 R21.0 R22.0 R23.0 R24.0 R25.0 R26.0 TR1.1 TR1.3

## Polygon pours and split planes (outlines as drawn)
no net on Keep-Out Layer "Top Layer-No Net" (solid): 1918,2898 ccw(c2165,2898) 2165,2651 2173,2651 ccw(c2173,2898) 2420,2898 2420,2908 ccw(c2173,2908) 2173,3155 ccw(c2173,2900) 1918,2900
NetC11_1 on Top Layer "Top Layer-No Net 1" (solid, pour order 0): 4211,2895 ccw(c4209.59,2896.42) 4211.39,2897.28 4072,3191 4490.99,3163.63 4639.86,2986.25 ccw(c4625.05,2529.99) 4452.34,2952.56 4391.04,2927.5 ccw(c4446.51,2791.77) 4353.16,2904.85 4317,2875 4221.97,2875
NetC11_1 on Top Layer "Top Layer-No Net 1" (solid, pour order 2): 4128,3068 4074.58,3121.42 ccw(c4008,3054.85) 4008,3149 4008,3248.93 cw(c4025.07,3248.93) 4013,3261 4041.71,3289.71 cw(c4112.42,3219) 4112.42,3319 4171,3319
NetC11_1 on Top Layer "Top Layer-No Net 2" (solid, pour order 12): 4463.51,2956.95 cw(c4626.85,2523.14) 4654.3,2985.87 ccw(c4960.48,5172.45) 5006,2965.01 5006,3039.76 cw(c5016.24,3039.76) 5009,3047 4768.29,3287.71 ccw(c4697.59,3217.02) 4697.58,3317 4468,3317
NetD5_K on Top Layer "Top Layer-No Net 2" (solid, pour order 16): 4504,2216 4513.58,2237.15 cw(c4601.37,2197.39) 4559.49,2284.19 ccw(c4343.36,2732.21) 4626.07,2322.93 cw(c4703.26,2211.18) 4703.26,2347 4776.96,2347 ccw(c4776.96,2462.98) 4858.97,2380.97 4911.08,2433.08 cw(c5002.62,2341.55) 5002.62,2471 5033,2471 5027,2609 5012.04,2609 cw(c5012.04,2732.22) 4924.91,2645.09 ccw(c4872.03,2592.22) 4872.02,2667 4412.97,2667 cw(c4412.97,2753.83) 4351.57,2692.43 4342.19,2701.81 ccw(c4300.7,2660.34) 4300.69,2719 4247,2719 ccw(c4246.99,2681.01) 4209,2681 4209,2592.09 ccw(c4331.37,2592.08) 4237.12,2514.04 4260.26,2486.09 cw(c4177.39,2417.44) 4285,2417.42 4285,2369.98 ccw(c4370.82,2369.98) 4331.06,2293.92 4345.66,2286.29 cw(c4313.83,2225.41) 4380.48,2242.07 4387,2216
350V on Top Layer "Top Layer-No Net 2" (solid, pour order 18): 2158,200.11 ccw(c1876.89,127.03) 2098.15,315.2 cw(c2255.33,448.87) 2049,448.87 2049,608 2506,608 2635,479 ccw(c2635,338.98) 2535.99,437.99 2263,165
AC_IN on Top Layer "Top Layer-No Net 2" (solid, pour order 20): 793.56,4889.56 782.16,4875.96 ccw(c999.32,4693.99) 716,4693.99 716,4571.53 ccw(c862.12,4571.53) 758.8,4468.2 770,4457 923,4610 935,4610 935,4748.13 ccw(c778.4,4748.13) 889.13,4858.87 846.52,4901.48
GND on Top Layer "Top Layer-No Net 2" (solid, pour order 31): 3612,2246 3629,2263 3629,2281 3601,2309 3491,2309 3482,2300 3483,2299 3483,2252 3490,2245 3510.54,2246.03
NetP1_3 on Bottom Layer "Top Layer-No Net 2" (solid, pour order 25): 4883,3380 5077,3380 5350,3107 5411,3107 5411,3763 5393,3781 5146,3781 5054,3689 4866,3689 4866,3400 4884,3382
NetP1_3 on Bottom Layer "Top Layer-No Net 2" (solid, pour order 22): 4905,531 5410,1036 5410,450 5406,446
GND on Bottom Layer "Top Layer-No Net" (solid, remove dead copper, pour order 27): 4910,2 4910,359 5061,510 5409.5,510 5409.55,4508 5039,4508 4910,4637 4910,5005.04 3167.05,5005 3067.12,4596.93 2836.18,4366 1409.18,2827 169.05,2827 -0.95,2657 -0.95,697 1.05,695 1.05,542 313.05,542 552.05,303 552.05,2
GND on Bottom Layer "Top Layer-No Net 2" (solid, pour order 29): 2151,4663 2151,4383.18 ccw(c2346.99,4383.18) 2208.41,4244.59 cw(c2124.89,4161.08) 2243,4161.08 2243,4100 2491,4100 2491,4210 2491,4432.99 ccw(c2261.62,4432.99) 2423.82,4595.18 2360.8,4658.2 ccw(c2257.47,4554.88) 2257.47,4701 2197,4701

## Silkscreen, mask and mechanical layers (free items; w line width, h text height)
Bottom Overlay:
  drawing of 4176 lines, arcs and shapes, not listed
  text "Power Factor Correction REV 2.0 / Ryan Vasquez Senior Design / Missouri S&T" at 472,2804 h70 r90
Mechanical 7:
  lines w19.68: 5159.45,-0.05 ccw(c5159.45,250) 5409.5,250 5409.5,4754.95 ; 5159.45,0 250.05,0 cw(c250.05,250.05) 0,250.05 0,4755 cw(c250.05,4755) 250.05,5005.05 5159.5,5005.05 ; 5159.5,5005 cw(c5159.5,4754.95) 5409.55,4754.95

## Text inside footprints (layer, text, board x,y; h text height)
C2: Top Overlay "+" at 5216.59,4379.55 h100 r270
C3: Top Overlay "+" at 2170.41,620.15 h100 r90
C4: Top Overlay "+" at 3450.59,852.7 h100 r270
C5: Top Overlay "+" at 4351.59,847.7 h100 r270
R27: Top Overlay "CW" at 3576.56,1202.65 h25